# EAGLE board Yun_Shield.v2.3 (EAGLE 7.3.0)
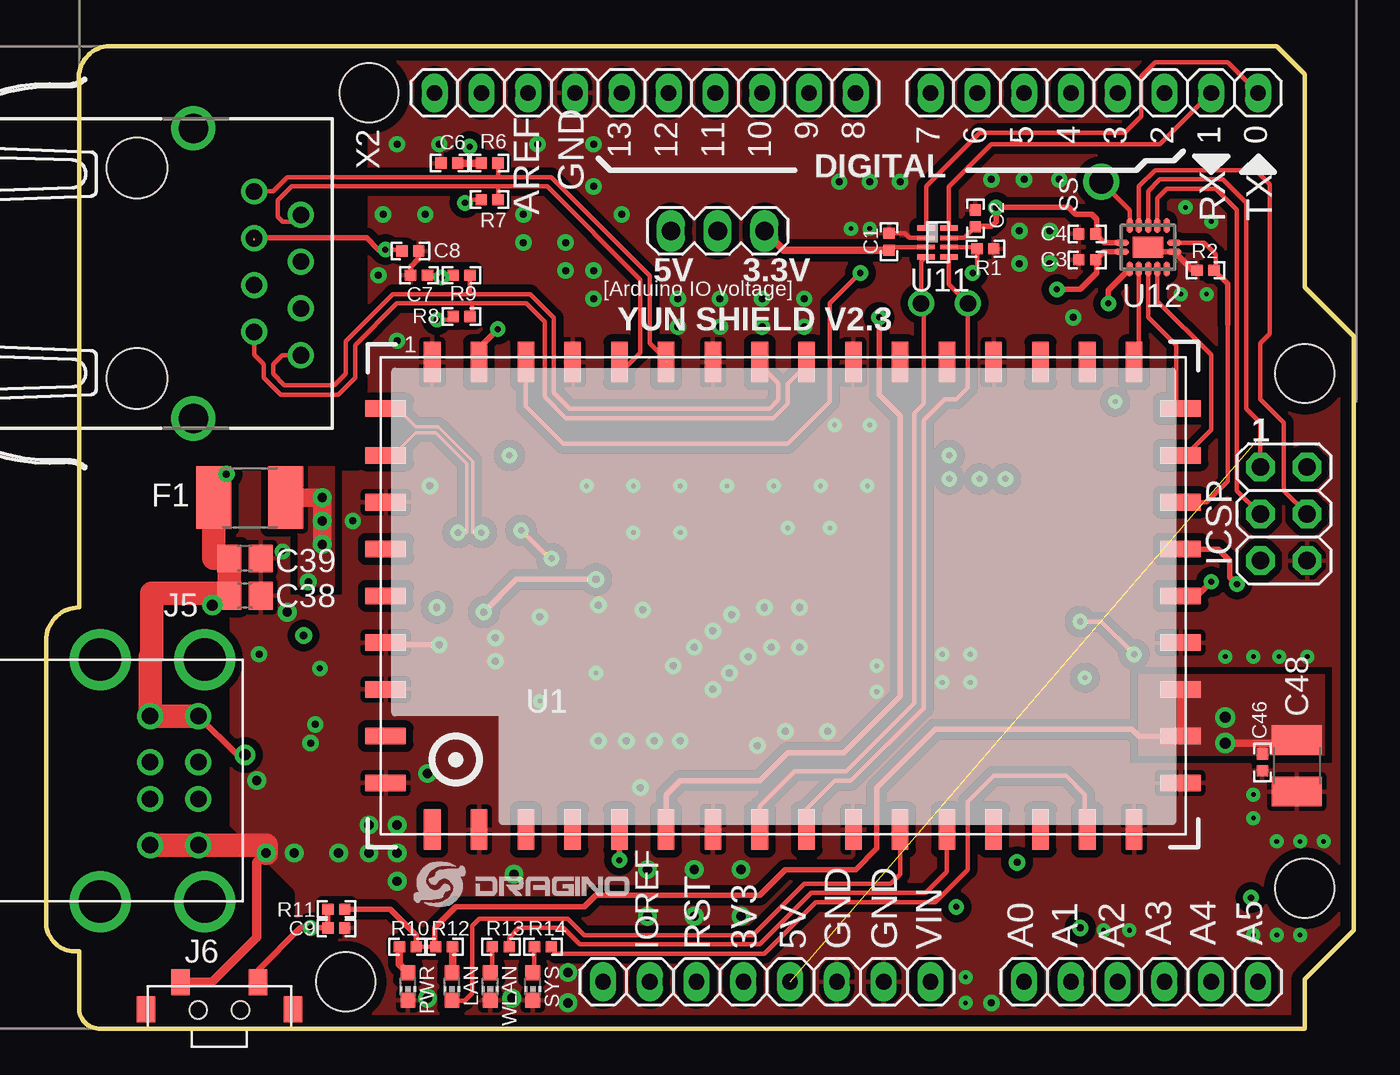
[diagram p0: board, top side]
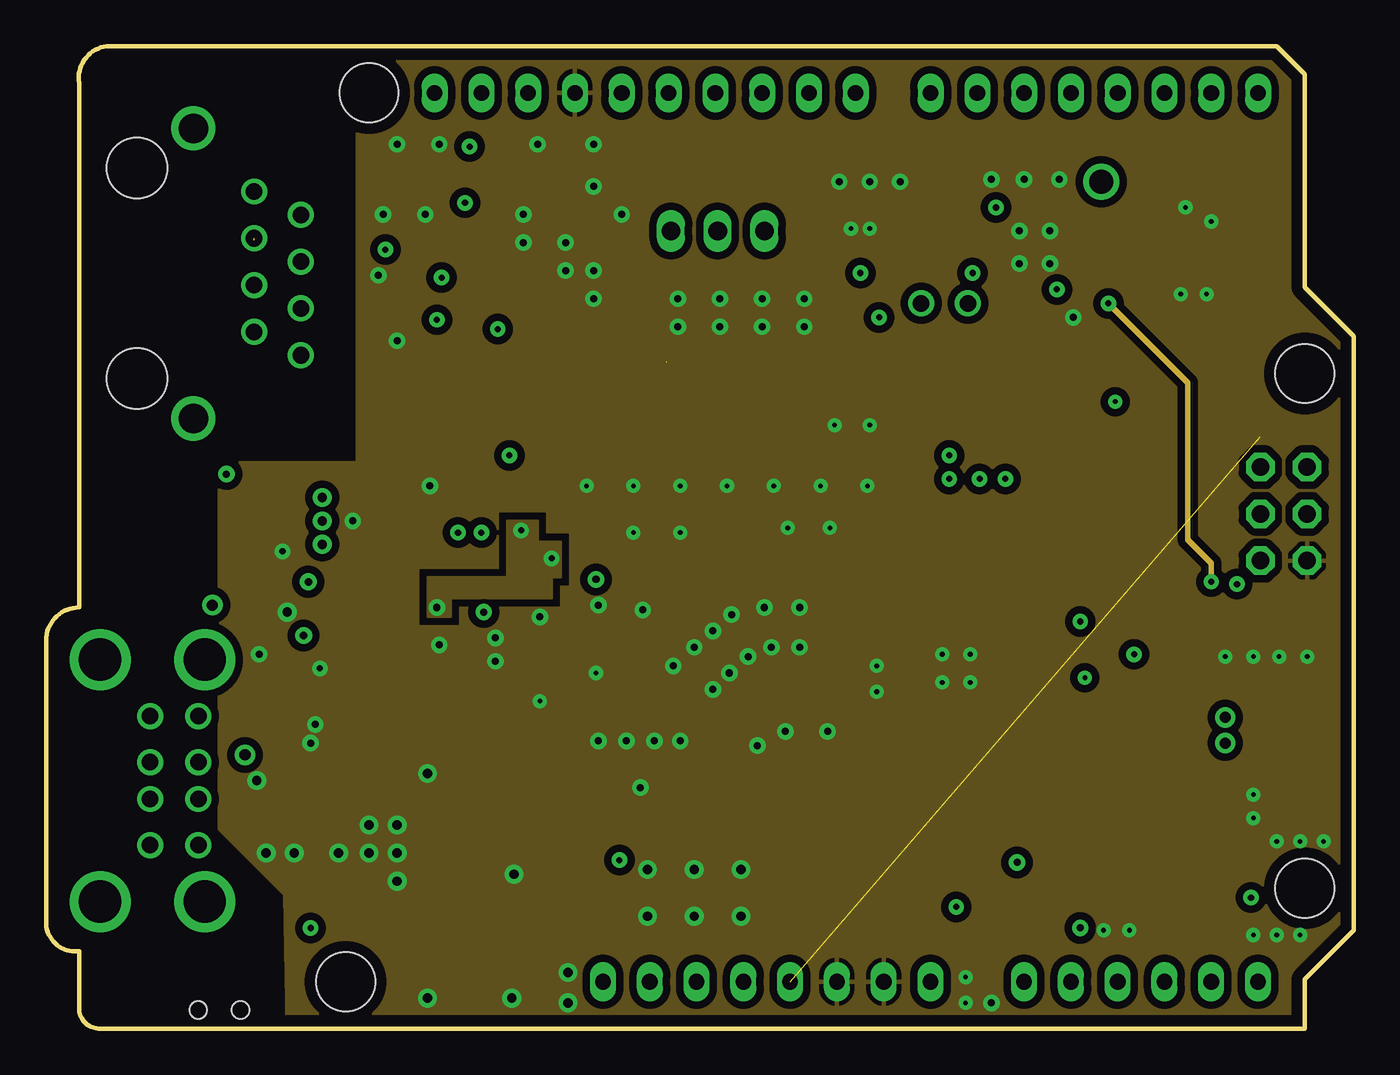
[diagram p1: board, inner layer GND]
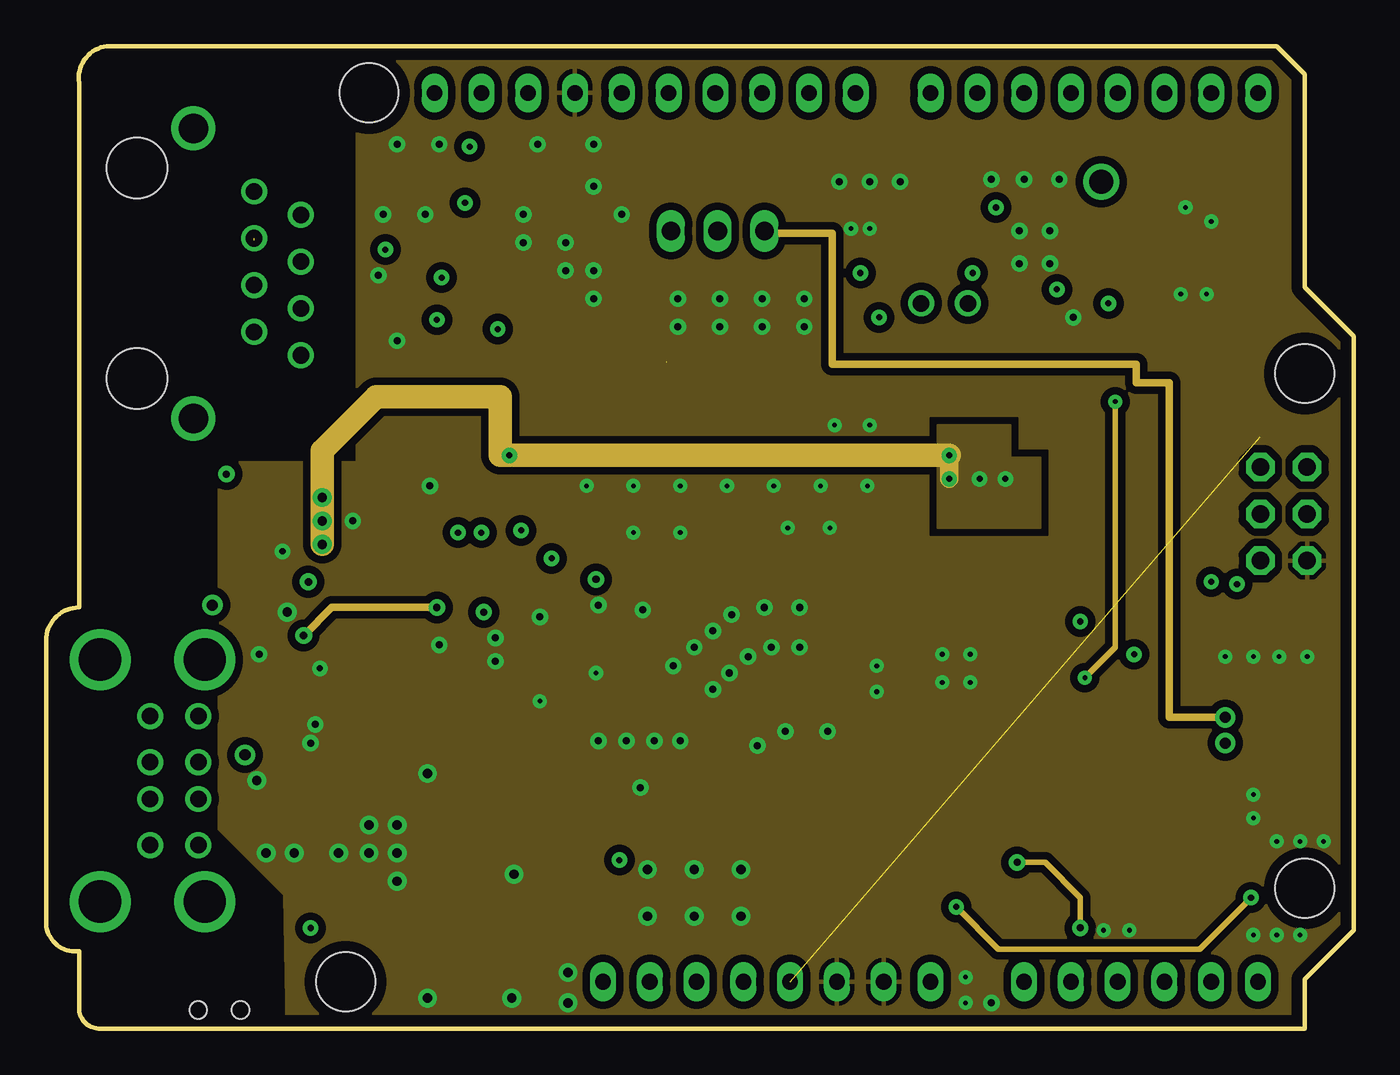
[diagram p2: board, inner layer VCC]
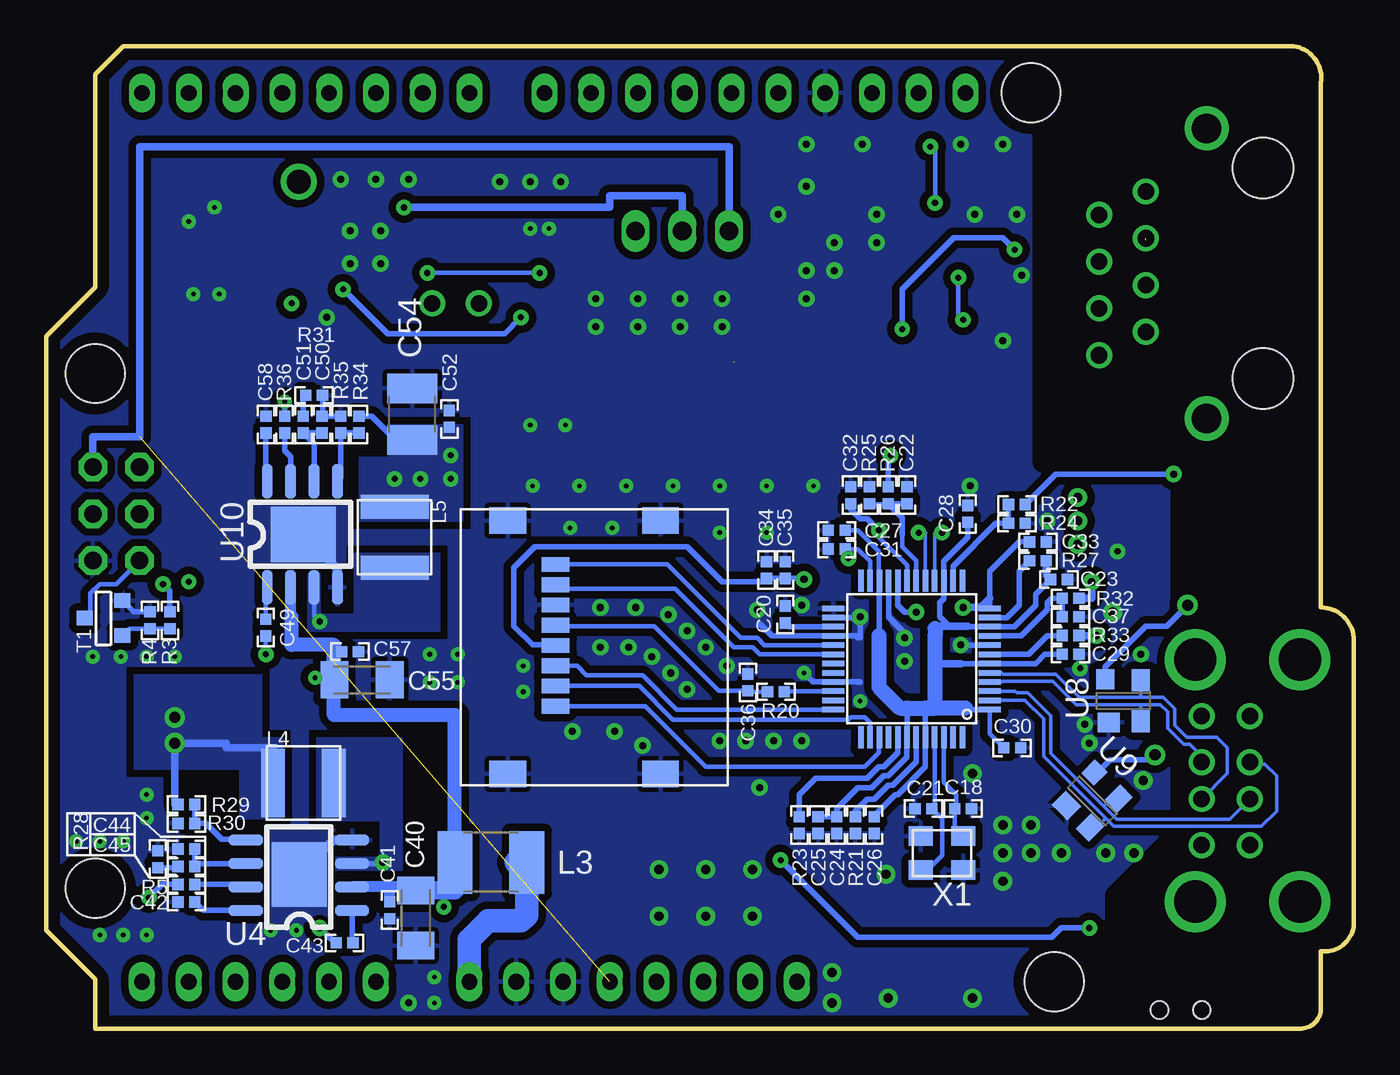
[diagram p3: board, bottom side, seen from below]

Size 71 x 53.35 mm. Coordinates in mm from the lower left corner, seen from the top.
Outline: 66.81,53.35 68.34,51.82 68.34,40.27 71,37.6 71,5.34 68.34,2.67 68.34,0.01 3.04,0.01 arc-90 1.79,1.02 1.79,4.2 1.41,4.2 arc-90 0.01,5.98 0.01,21.09 arc-90 1.79,22.87 1.79,51.35 arc-90 3.3,53.35 66.81,53.35
Copper layers (1*2+15*16): Top 0.035mm / dielectric 10mil / GND 0.017mm / dielectric 15mil / VCC 0.017mm / dielectric 10mil / Bottom 0.035mm
Design rules "default *": minimum track width 10mil, minimum drill 22mil, track to track 6mil, track to pad 8mil, pad to pad 8mil, via to via 12mil, smd to smd 8mil, copper to edge 24mil, drill to drill 12mil, minimum pad ring 10mil, minimum via ring 10mil, stop-mask expansion 2mil, vias tented up to drill 30mil, thermal gap 10mil
Net classes: 0 default: width 0.203 mm, clearance 0.254 mm; 1 power: width 0.254 mm, drill 0.61 mm, clearance 0.254 mm; 2 gnd: width 0.305 mm, drill 0.305 mm, clearance 0.254 mm; 3 usbvcc: width 0.254 mm, drill 0.61 mm, clearance 0.254 mm; 4 aref: width 0.254 mm, drill 0.61 mm, clearance 0.254 mm; 5 usbtrace: width 0.254 mm, clearance 0.152 mm; 6 usbtrace-4layer: width 0.191 mm, clearance 0.203 mm
Holes 3.2 mm at 68.34,35.57 68.34,7.63 17.54,50.81 16.27,2.55
tRestrict: area 3.1,0.9 to 16.9,52.6
bRestrict: area 3.1,0.9 to 16.9,52.5
vRestrict: area 43.6,35.2 to 44.1,35.7

## Footprints (pad centres in the part's own frame; a part is rotated, then mirrored left to right if it is on the bottom)
C0402 = smd 0.61 x 0.61: 1 -0.457,0; 2 0.457,0
C0805 = smd 1.3 x 1.5: 1 -0.85,0; 2 0.85,0
C1206K = smd 1.5 x 2: 1 -1.5,0; 2 1.5,0
C1210 = smd 1.6 x 2.7: 1 -1.4,0; 2 1.4,0
L1812 = smd 1.9 x 3.4: 1 -1.95,0; 2 1.95,0
2X03 = drill 0.95 pad 1.55 octagon: 1 -2.54,-1.27; 2 -2.54,1.27; 3 0,-1.27; 4 0,1.27; 5 2.54,-1.27; 6 2.54,1.27
1X08 = drill 0.85 pad 1.422 long: 1 -8.89,0; 2 -6.35,0; 3 -3.81,0; 4 -1.27,0; 5 1.27,0; 6 3.81,0; 7 6.35,0; 8 8.89,0
1X06 = drill 0.85 pad 1.422 long: 1 -6.35,0; 2 -3.81,0; 3 -1.27,0; 4 1.27,0; 5 3.81,0; 6 6.35,0
USB-DUAL-JS-AF10-002 = drill 0.9: 1 0,3.5; 2 0,1; 3 0,-1; 4 0,-3.5; 5 -2.62,3.5; 6 -2.62,1; 7 -2.62,-1; 8 -2.62,-3.5 | drill 2.3: 9 0.35,6.57; 10 0.35,-6.57; 11 -5.33,6.57; 12 -5.33,-6.57
TS-017 = smd 1 x 1.4: P$1 -2.1,-1.5; P$2 2.1,-1.5; P$3 -3.994,-0.034; P$4 3.994,-0.034 | hole 0.95: -1.15,0; 1.15,0
1X10 = drill 0.85 pad 1.422 long: 1 -11.43,0; 2 -8.89,0; 3 -6.35,0; 4 -3.81,0; 5 -1.27,0; 6 1.27,0; 7 3.81,0; 8 6.35,0; 9 8.89,0; 10 11.43,0
SWPA4020S = smd 3.7 x 1.3: P$1 0,1.65; P$2 0,-1.65
CHIP-LED0603 = smd 0.8 x 0.8: A 0,-0.75; C 0,0.75
R0402 = smd 0.61 x 0.61: 1 -0.457,0; 2 0.457,0
MA03-1 = drill 1.016 long: 1 -2.54,0; 2 0,0; 3 2.54,0
SOT-23 = smd 0.787 x 0.889: 1 0,-1.016; 2 -0.95,1.016; 3 0.95,1.016
TEST-POINT-TH = drill 1.3: P$1 0,0
HE50 = smd 0.9 x 2.198: 1 -19.05,12.69; 2 -16.51,12.69; 3 -13.97,12.69; 4 -11.43,12.69; 5 -8.89,12.69; 6 -6.35,12.69; 7 -3.81,12.69; 8 -1.27,12.69; 9 1.27,12.69; 10 3.81,12.69; 11 6.35,12.69; 12 8.89,12.69; 13 11.43,12.69; 14 13.97,12.69; 15 16.51,12.69; 16 19.05,12.69; 26 19.05,-12.69; 27 16.51,-12.69; 28 13.97,-12.69; 29 11.43,-12.69; 30 8.89,-12.69; 31 6.35,-12.69; 32 3.81,-12.69; 33 1.27,-12.69; 34 -1.27,-12.69; 35 -3.81,-12.69; 36 -6.35,-12.69; 37 -8.89,-12.69; 38 -11.43,-12.69; 39 -13.97,-12.69; 40 -16.51,-12.69; 41 -19.05,-12.69 | smd 2.198 x 0.9: 17 21.579,10.16; 18 21.579,7.62; 19 21.579,5.08; 20 21.579,2.54; 21 21.579,0; 22 21.579,-2.54; 23 21.579,-5.08; 24 21.579,-7.62; 25 21.579,-10.16; 42 -21.579,-10.16; 43 -21.579,-7.62; 44 -21.579,-5.08; 45 -21.579,-2.54; 46 -21.579,0; 47 -21.579,2.54; 48 -21.579,5.08; 49 -21.579,7.62; 50 -21.579,10.16
AU6350_LQFP-48 = smd 1.2 x 0.3: 1 -4.25,2.75; 2 -4.25,2.25; 3 -4.25,1.75; 4 -4.25,1.25; 5 -4.25,0.75; 6 -4.25,0.25; 7 -4.25,-0.25; 8 -4.25,-0.75; 9 -4.25,-1.25; 10 -4.25,-1.75; 11 -4.25,-2.25; 12 -4.25,-2.75; 25 4.25,-2.75; 26 4.25,-2.25; 27 4.25,-1.75; 28 4.25,-1.25; 29 4.25,-0.75; 30 4.25,-0.25; 31 4.25,0.25; 32 4.25,0.75; 33 4.25,1.25; 34 4.25,1.75; 35 4.25,2.25; 36 4.25,2.75 | smd 0.3 x 1.2: 13 -2.75,-4.25; 14 -2.25,-4.25; 15 -1.75,-4.25; 16 -1.25,-4.25; 17 -0.75,-4.25; 18 -0.25,-4.25; 19 0.25,-4.25; 20 0.75,-4.25; 21 1.25,-4.25; 22 1.75,-4.25; 23 2.25,-4.25; 24 2.75,-4.25; 37 2.75,4.25; 38 2.25,4.25; 39 1.75,4.25; 40 1.25,4.25; 41 0.75,4.25; 42 0.25,4.25; 43 -0.25,4.25; 44 -0.75,4.25; 45 -1.25,4.25; 46 -1.75,4.25; 47 -2.25,4.25; 48 -2.75,4.25
RT8250-SOP8 = smd 1.88 x 0.61: 1 -1.219,0; 2 -1.219,-1.27; 3 -1.219,-2.54; 4 -1.219,-3.81; 5 4.547,-3.81; 6 4.547,-2.54; 7 4.547,-1.27; 8 4.547,0 | smd 2.997 x 3.505: 9 1.651,-1.956
SOT143 = smd 1.194 x 1.067: 1 -0.72,-1.207 | smd 0.991 x 1.194: 2 1.007,-1.143; 3 1.007,1.067 | smd 0.991 x 1.067: 4 -0.923,1.13
NXP-SOT833-1 = smd 1 x 0.3: 1 -0.614,0.778 | smd 0.95 x 0.25: 2 -0.639,0.253; 3 -0.639,-0.247; 6 0.611,-0.247; 7 0.611,0.253 | smd 0.95 x 0.3: 4 -0.639,-0.772; 5 0.611,-0.772; 8 0.611,0.778
DHVQFN14 = smd 0.8 x 0.35: 1 -1.425,-0.25; 7 1.425,-0.25; 8 1.425,0.25; 14 -1.425,0.25 | smd 0.35 x 0.8: 2 -1,-1.175; 3 -0.5,-1.175; 4 0,-1.175; 5 0.5,-1.175; 6 1,-1.175; 9 1,1.175; 10 0.5,1.175; 11 0,1.175; 12 -0.5,1.175; 13 -1,1.175 | smd 1.65 x 1.15: EXP 0,0
RIONET_472192001_SD = smd 0.8 x 1.5: 1 3.2,-1.55; 2 2.1,-1.55; 3 1,-1.55; 4 -0.1,-1.55; 5 -1.2,-1.55; 6 -2.3,-1.55; 7 -3.4,-1.55; 8 -4.5,-1.55 | smd 1.45 x 2: G1 6.875,-4.15; G2 6.875,4.15; G3 -6.875,4.15; G4 -6.875,-4.15
SMARTPRJ_CRYSTAL-3.2-2.5 = smd 1.3 x 1.05: 1 -1.15,-0.925; 2 1.15,-0.925; 3 1.15,0.925; 4 -1.15,0.925
RJ111BE = drill 0.9 pad 1.3: 1 -4.445,0; 2 -3.175,2.54; 3 -1.905,0; 4 -0.635,2.54; 5 0.635,0; 6 1.905,2.54; 7 3.175,0; 8 4.445,2.54 | drill 1.6 pad 2.184: M1 -7.875,-3.3; M2 7.875,-3.3 | hole 3.3: 5.715,-6.35; -5.715,-6.35

## Placement (x,y rotation side)
C1  0.1uF  [C0402]  45.77,42.72 270 top
C2  0.1uF  [C0402]  50.45,43.99 270 top
C3  0.1uF  [C0402]  56.53,41.74 0 top
C4  0.1uF  [C0402]  56.53,43.15 0 top
C6  0.1u 10v  [C0402]  21.9,47 180 top
C7  0.1u 10v  [C0402]  20.25,40.9 180 top
C8  0.1u 10v  [C0402]  19.78,42.22 0 top
C9  0.1u NL  [C0402]  15.76,5.47 0 top
C18  18pF  [C0402]  21.22,11.94 0 bottom
C20  1uF  [C0402]  30.87,22.49 90 bottom
C21  18pF  [C0402]  23.38,11.94 180 bottom
C22  1uF  [C0402]  24.27,28.96 90 bottom
C23  4.7uF  [C0402]  16.01,24.39 0 bottom
C24  4.7uF  [C0402]  28.08,11.06 270 bottom
C25  1uF  [C0402]  29.09,11.06 270 bottom
C26  4.7uF  [C0402]  26.05,11.06 270 bottom
C27  0.1uF  [C0402]  28.08,27.06 180 bottom
C28  0.1uF  [C0402]  20.97,27.95 90 bottom
C29  0.1uF  [C0402]  15.38,20.33 0 bottom
C30  0.1uF  [C0402]  18.55,15.25 0 bottom
C31  4.7uF  [C0402]  28.08,26.04 180 bottom
C32  4.7uF  [C0402]  27.32,28.96 90 bottom
C33  0.1uF  [C0402]  17.16,26.42 0 bottom
C34  0.1uF  [C0402]  31.89,24.9 90 bottom
C35  1uF  [C0402]  30.87,24.9 90 bottom
C36  10pf,NL  [C0402]  32.9,18.8 90 bottom
C37  2.2uF  [C0402]  15.38,22.36 0 bottom
C38  10uF  [C0805]  10.81,23.5 180 top
C39  10uF  [C0805]  10.81,25.53 180 top
C40  10u,25v  [C1206K]  50.94,6.01 270 bottom
C41  NL  [C0402]  52.34,6.43 270 bottom
C42  0.1u,10v  [C0402]  63.38,6.88 180 bottom
C43  0.01u,16v  [C0402]  54.8,4.66 180 bottom
C44  NL  [C0402]  63.38,9.76 0 bottom
C45  3900pf,25v  [C0402]  63.38,8.8 0 bottom
C46  NL  [C0402]  66.03,14.46 90 top
C48  22u,10v  [C1210]  67.9,14.27 270 top
C49  0.01u,16v  [C0402]  59.07,21.77 270 bottom
C50  NL  [C0402]  56.02,32.8 270 bottom
C51  3900pf,25v  [C0402]  57.03,32.8 270 bottom
C52  NL  [C0402]  49.11,33.1 270 bottom
C54  22u,10v  [C1210]  51.12,33.37 90 bottom
C55  10uf,25v  [C1206K]  53.84,18.94 0 bottom
C57  NL  [C0402]  54.5,20.47 0 bottom
C58  0.1u,10v  [C0402]  59.07,32.8 90 bottom
F1  Fuse , 1A  [L1812]  11.06,28.84 0 top
ICSP  ICSP  [2X03]  67.19,27.95 270 top
J2  8x1F-H8.5  [1X08]  56.91,50.81 180 top
J3  8x1F-H8.5  [1X08]  39.13,2.55 0 top
J4  6x1F-H8.5  [1X06]  59.45,2.55 0 top
J5  USB-CON-A-DUAL  [USB-DUAL-JS-AF10-002]  8.27,13.47 0 top
J6  SWITCHTS-017  [TS-017]  9.41,1.02 180 top
JP1  10x1F-H8.5  [1X10]  32.52,50.81 180 top
L3  1A  [L1812]  46.85,9.03 180 bottom
L4  10uH /SWPA4020S100MT  [SWPA4020S]  57.03,13.34 270 bottom
L5  15uH / SWPA4030S150MT  [SWPA4020S]  52.08,26.68 180 bottom
LAN  Yellow  [CHIP-LED0603]  22.03,2.29 180 top
PWR  Yellow-Green  [CHIP-LED0603]  19.65,2.29 180 top
R1  10k  [R0402]  51,42.34 180 top
R2  10k  [R0402]  62.94,41.18 0 top
R3  10k  [R0402]  64.28,22.17 90 bottom
R4  10k  [R0402]  65.36,22.17 90 bottom
R5  100K  [R0402]  63.38,7.83 180 bottom
R6  49.9R  [R0402]  24.08,47 0 top
R7  49.9R  [R0402]  24.08,45.01 0 top
R8  49.9R  [R0402]  22.56,38.66 0 top
R9  49.9R  [R0402]  22.56,40.9 0 top
R10  330R  [R0402]  19.64,4.45 180 top
R11  10K  [R0402]  15.76,6.48 0 top
R12  330R  [R0402]  21.61,4.45 0 top
R13  270R  [R0402]  24.69,4.45 180 top
R14  270R  [R0402]  26.97,4.45 180 top
R20  0R  [R0402]  31.38,18.29 180 bottom
R21  680  [R0402]  27.06,11.06 90 bottom
R22  5.1K  [R0402]  18.3,28.45 0 bottom
R23  330  [R0402]  30.11,11.06 270 bottom
R24  10K  [R0402]  18.3,27.44 180 bottom
R25  470K  [R0402]  26.3,28.96 90 bottom
R26  47K  [R0402]  25.28,28.96 90 bottom
R27  0R  [R0402]  17.16,25.41 180 bottom
R28  6.81K  [R0402]  64.94,9.2 270 bottom
R29  26.1K  [R0402]  63.38,12.17 180 bottom
R30  10K  [R0402]  63.38,11.14 0 bottom
R31  6.81K  [R0402]  56.45,34.39 180 bottom
R32  0R  [R0402]  15.38,23.37 180 bottom
R33  0R  [R0402]  15.38,21.34 180 bottom
R34  45.3K  [R0402]  54.02,32.8 90 bottom
R35  10K  [R0402]  55.01,32.8 270 bottom
R36  100K  [R0402]  58.05,32.8 90 bottom
SV1  [MA03-1]  36.46,43.31 0 top
SYS  WHITE  [CHIP-LED0603]  26.43,2.29 180 top
T1  BSS138/SOT23  [SOT-23]  67.88,22.29 270 bottom
TP1  TEST-POINTTH  [TEST-POINT-TH]  57.29,45.98 0 top
U1  HE  [HE50]  40.02,23.5 0 top
U3  AU6353  [AU6350_LQFP-48]  24.01,20.07 180 bottom
U4  RT8250  [RT8250-SOP8]  55.61,6.43 180 bottom
U8  YSSR05  [SOT143]  12.58,17.84 0 bottom
U9  YSSR05  [SOT143]  14.23,12.45 315 bottom
U10  RT8250  [RT8250-SOP8]  59,25.18 90 bottom
U11  NTB0102GT  [NXP-SOT833-1]  48.4,42.68 0 top
U12  NTB0104  [DHVQFN14]  59.83,42.42 0 top
U$1  LOGO-NEW  [LOGO-SILK-NEW]  19.95,6.61 0 top
U$14  [RIONET_472192001_SD]  41.79,20.71 270 bottom
WLAN  BLUE  [CHIP-LED0603]  24.12,2.29 180 top
X1  12Mhz  [SMARTPRJ_CRYSTAL-3.2-2.5]  22.36,9.53 180 bottom
X2  RJ111BE  [RJ111BE]  11.3,41.01 270 top

## Library data of the parts
C1-C4 C6-C9 C18 C20-C46 C48-C52 C54 C55 C57 C58 F1 J5 J6 L3-L5 LAN PWR R1-R14 R20-R36 SYS U1 U3 U4 U8-U12 U$1 U$14 WLAN = dragino
ICSP J2-J4 JP1 = SmartPrj
SV1 = con-lstb; OC_FARNELL: unknown; OC_NEWARK: unknown
T1 X2 = dragino; OC_FARNELL: unknown; OC_NEWARK: unknown
TP1 = dragino-passive
X1 = rionita7

## Nets
2.5V: C3.2 U1.36 U12.1
+3V3: C1.2 C46.2 C48.1 L4.P$2 R10.1 R11.2 R12.1 R29.2 SV1.3 U1.23 U1.24 U11.3
+5V [usbvcc]: ICSP.2 J3.5 SV1.1
+5V_USB [usbvcc]: C52.2 C54.1 F1.2 L5.P$2 R26.2 R32.1 R34.2
/RESET: ICSP.5 T1.1
CHIP_RESETN: C22.1 R25.1 R26.1 U3.18
CPWR_V33: C34.1 C35.1 U3.20 U$14.4
CTRL_2.0V: C8.1 U1.2 X2.3
DP1_OVRCUR: R22.1 R24.2 U3.14
DP1_PWRUP: U3.13
GND [gnd]: C1.1 C2.1 C3.1 C4.1 C6.2 C7.2 C8.2 C9.2 C18.2 C20.2 C21.2 C22.2 C23.2 C24.2 C25.2 C26.2 C27.2 C28.2 C29.2 C30.2 C31.2 C32.2 C33.2 C34.2 C35.2 C36.2 C37.2 C38.1 C39.1 C40.2 C41.2 C42.2 C44.1 C46.1 C48.2 C50.1 C52.1 C54.2 C55.2 C57.2 C58.2 ICSP.6 J3.6 J3.7 J5.4 J5.8 J6.P$2 JP1.7 PWR.C R1.1 R2.1 R4.2 R21.1 R23.2 R24.1 R25.2 R28.1 R30.1 R31.1 R35.1 SYS.C T1.2 U1.1 U1.4 U1.7 U1.10 U1.13 U1.22 U1.25 U1.26 U1.32 U1.35 U1.40 U1.42 U1.44 U1.45 U1.48 U3.8 U3.21 U3.25 U3.26 U3.28 U3.33 U4.4 U4.9 U8.1 U9.1 U10.4 U10.9 U11.2 U12.7 U12.EXP U$14.6 U$14.G1 U$14.G2 U$14.G3 U$14.G4 WLAN.C X1.2 X1.4
GPIO18: U1.18 U12.5
GPIO19: R2.2 U1.19 U12.8
GPIO20: R3.2 U1.20
GPIO21: U1.16 U12.3
GPIO22: U1.17 U12.4
GPIO23: U1.21 U12.2
GPIO24: R1.2 U1.3 U11.6
GPIO28: R14.1 U1.27
JUMPSTART: C9.1 J6.P$1 R11.1 U1.37
LED_P0: LAN.C U1.31
LED_WLAN: R13.1 U1.30
MISO: ICSP.1 U12.11
MOSI: ICSP.4 U12.12
N$1: R3.1 R4.1 T1.3
N$3: C6.1 R6.1 R7.1
N$4: PWR.A R10.2
N$5: C7.1 R8.1 R9.1
N$6: LAN.A R12.2
N$8: R13.2 WLAN.A
N$9: R14.2 SYS.A
N$11: R5.1 U4.7
N$12: R23.1 U3.41
N$16: R21.2 U3.43
N$19: C42.1 U4.8
N$22: C36.1 R20.2 U$14.5
N$23: C20.1 U3.27
N$24: R27.2 U3.11
N$25: C43.1 U4.1
N$26: C43.2 L4.P$1 U4.3
N$27: C44.2 C45.2 U4.6
N$28: C45.1 R28.2
N$29: C37.1 R32.2 U3.9
N$30: R33.2 U3.7
N$31: R29.1 R30.2 U4.5
N$32: C49.1 U10.1
N$33: C49.2 L5.P$1 U10.3
N$34: C50.2 C51.2 U10.6
N$35: C51.1 R31.2
N$36: R34.1 R35.2 U10.5
N$37: R36.1 U10.7
N$38: C58.1 U10.8
N$101: C40.1 C41.1 C55.1 C57.1 L3.2 R5.2 R36.2 U4.2 U10.2
OPTIONAL_ANT: U1.41
P0_RX_N: R9.2 U1.8 X2.8
P0_RX_P: R8.2 U1.9 X2.7
P0_TX_N: R7.2 U1.5 X2.2
P0_TX_P: R6.2 U1.6 X2.1
P1_P2_PWR: C38.2 C39.2 F1.1 J5.1 J5.5 R22.2 U8.4 U9.4
RX: J2.1 U11.1
SCK: ICSP.3 U12.10
SD_CLK: R20.1 U3.34
SD_CMD: U3.36 U$14.3
SD_DAT0: U3.30 U$14.7
SD_DAT1: U3.29 U$14.8
SD_DAT2: U3.39 U$14.1
SD_DAT3: U3.38 U$14.2
SS: TP1.P$1 U12.13
TX: J2.2 U11.8
UART_RX: U1.33 U11.5
UART_TX: U1.34 U11.4
USB3_D_N [usbtrace-4layer]: J5.6 U3.2 U9.2
USB3_D_P [usbtrace-4layer]: J5.7 U3.3 U9.3
USB4_D_N [usbtrace-4layer]: J5.2 U3.4 U8.2
USB4_D_P [usbtrace-4layer]: J5.3 U3.5 U8.3
USB_N [usbtrace]: U1.50 U3.17
USB_P [usbtrace]: U1.49 U3.16
VCC1.8: C31.1 C32.1 C33.1 R33.1 U3.12 U3.19 U3.23
VCC3.3: C23.1 C24.1 C25.1 C26.1 C27.1 C28.1 C29.1 C30.1 R27.1 U3.1 U3.6 U3.10 U3.15 U3.22 U3.42 U3.44
VDC [usbvcc]: C2.2 C4.2 SV1.2 U11.7 U12.14
VIN: J3.8 L3.1
XSCI: C18.1 U3.46 X1.1
XSCO: C21.1 U3.45 X1.3

## Tracks (layer width: path | path; a pad name or v marks a point on that pad's centre or on a via)
2.5V  (via drill 0.33)
  Top 0.305: U12.1 57.42,42.17 C3.2 57.03,41.69 57.03,41.03 56.14,40.14 v54.87,40.14 | U1.36 33.67,12.71 34.43,13.47 38.75,13.47 40.27,14.99 43.32,14.99 46.37,18.04 46.37,33.28 45.22,34.42 v45.22,38.61
  Bottom 0.305: v45.22,38.61 46.11,37.73 52.46,37.73 v54.87,40.14
+3V3  (via drill 0.6)
  Top 0.254: R12.1 R10.1 | U11.3 45.93,42.43 C1.2
  Top 0.305: U1.24 59.32,15.88 58.94,16.26 48.27,16.26 45.1,13.09 45.1,9.79 43.95,8.64 40.14,8.64 38.75,7.25 29.86,7.25 29.22,6.61 22.24,6.61 21.09,5.47 21.09,4.51 R12.1 | R10.1 20.1,5.06 18.68,6.48 R11.2
  Top 0.406: C46.2 66.03,15.5 | 66.03,15.5 v64.02,15.5 | C48.1 67.9,15.5 66.03,15.5 | U1.23 U1.24 | C1.2 40.05,42.27 SV1.3
  VCC 0.406: v64.02,16.9 60.97,16.9 60.97,35.06 59.19,35.06 59.19,36.07 42.68,36.07 42.68,43.19 39,43.19 SV1.3
  Bottom 0.406: R29.2 64.02,12.17 v64.02,15.5 61.22,15.5 61.22,15.25 58.68,15.25 L4.P$2
  pour Bottom (no thermals): 58.18,15.75 58.18,11.44 60.46,11.44 60.46,14.1 66.18,14.1 66.18,19.18 59.32,19.18 59.32,15.75
  pour Top (no thermals): 59.32,19.18 69.35,19.18 69.35,14.87 59.32,14.87
+5V  (1 unrouted)
  Bottom 0.406: ICSP.2 68.46,32.14 65.92,32.14 65.92,47.89 33.92,47.89 SV1.1
+5V_USB  (via drill 0.33, 0.41, 0.51)
  Top 1.016: v15,26.3 v15,28.84 F1.2
  VCC 1.016: v49.03,29.85 v49.03,31.12 | 25.41,31.12 v25.16,31.12
  VCC 1.27: v49.03,31.12 25.41,31.12 | v25.16,31.12 24.65,31.12 24.65,34.3 17.92,34.3 15,31.38 v15,26.3
  Bottom 0.305: R34.2 53.33,33.26 52.08,32.01 51.17,32.01 C54.1 | R26.2 25.28,31.12 v25.16,31.12
  Bottom 0.406: R32.1 14.23,23.37 v14.23,24.26
  other vias: 50.68,29.85 52.08,29.85 15,27.57
  pour Bottom (no thermals): 48.4,32.77 48.4,27.57 53.99,27.57 53.99,30.99 52.33,30.99 52.33,32.77
  pour VCC (no thermals): 48.4,31.76 48.4,27.18 53.99,27.18 53.99,30.99 52.33,30.99 52.33,32.77 48.4,32.77
  pour Top: 13.85,30.49 15.63,30.49 15.63,24.01 13.73,24.01 13.73,30.49
/RESET
  Bottom 0.254: T1.1 68.59,22.6 68.59,23.63 68.08,24.14 67.19,24.14 ICSP.5
CHIP_RESETN
  Bottom 0.254: 24.52,26.8 24.52,26.17 23.76,25.41 U3.18
  Bottom 0.305: 24.52,26.8 24.52,27.74 R26.1 | R26.1 25.28,28.45 26.25,28.45 R25.1 | R26.1 C22.1
CPWR_V33  (via drill 0.38)
  Top 0.305: v23.76,22.61 25.54,24.39 v29.86,24.39
  Bottom 0.305: U3.20 24.78,24.31 24.78,22.99 24.39,22.61 v23.76,22.61 | U$14.4 43.37,20.83 44.59,20.83 45.6,21.85 45.6,25.03 44.46,26.17 36.21,26.17 34.3,24.26 32.07,24.26 C34.1 C35.1 29.91,24.44 v29.86,24.39
CTRL_2.0V  (via drill 0.33)  (1 unrouted)
  Top 0.254: v18.43,42.3 19.31,42.3 C8.1 | C8.1 | C8.1 19.31,42.17
  Top 0.305: v18.43,42.3 18.04,42.3 17.41,42.93 11.44,42.93 11.31,42.81 | 23.51,36.05 U1.2 23.51,36.96 v24.52,37.98
  Bottom 0.305: v24.52,37.98 24.52,40.14 21.73,42.93 19.06,42.93 v18.43,42.3
DP1_OVRCUR
  Bottom 0.305: U3.14 21.76,25.12 19.44,27.44 R24.2 R22.1
GND  (via drill 0.25, 0.33, 0.38, 0.51)
  Top 0.254: C1.1 46.63,43.18 46.87,42.93 U11.2
  Top 0.305: v21.35,20.83 18.58,20.83 18.57,20.85 | C7.2 19.79,41.38 20.2,41.79 20.2,42.3 | R2.1 62.25,41.18 U12.7 60.08,42.17 U12.EXP
  Top 0.508: v11.95,9.53 11.44,9.02 11.44,4.96 9,2.52 J6.P$2
  Top 1.27: J5.8 J5.4 11.95,9.97 v11.95,9.53
  Bottom 0.305: U3.21 25.26,22.34 24.39,21.47 | U3.26 26.9,22.32 26.81,22.23 | 26.95,18.82 26.93,18.8 | U3.8 20.95,20.82 20.97,20.83 v21.35,20.83 | R4.2 66.26,22.63 T1.2 | R31.1 55.99,33.28 C50.1 R35.1 | v26.81,22.36 26.81,21.22 26.93,21.22 26.93,21.32 U3.28 31.61,21.32 32.27,21.98 | v29.86,19.31 29.37,18.82 28.33,18.82 U3.33 26.83,18.82 26.81,18.8
  Bottom 0.508: U10.4 55.19,24.97 U10.9 | U4.4 55.41,10.24 U4.9
  other vias: 25.28,1.66 20.71,1.66 19.06,8.01 13.47,9.53 17.54,9.53 13.09,22.61 12.84,25.91 28.33,3.05 15.89,9.53 17.54,11.06 19.06,11.06 19.06,9.53 25.41,8.39 31.51,15.63 24.39,21.22 24.39,19.95 34.05,19.69 33.03,15.63 34.43,15.63 29.98,15.63 39.38,20.71 40.9,20.71 35.19,20.71 36.21,21.6 37.22,22.49 39,22.87 40.9,22.87 38.11,20.2 37.09,19.31 36.21,18.42 14.62,16.52 14.36,15.5 14.87,19.56 20.84,29.47 16.65,27.57 32.4,22.74 29.98,22.99 29.35,29.47 38.62,15.37 40.14,16.14 42.43,16.14 20.71,13.85 11.44,13.47 11.57,20.33 32.27,13.09 51.32,1.4 51.32,46.11 53.1,46.11 55,46.11 46.37,45.98 44.71,45.98 43.06,45.98 34.3,39.63 36.59,39.63 38.87,39.63 41.16,39.63 41.16,38.11 38.87,38.11 36.59,38.11 34.3,38.11 25.92,44.2 25.92,42.68 28.2,42.68 28.2,41.15 29.73,39.63 29.73,41.15 19.06,37.34 18.3,44.2 20.58,44.2 19.06,48.01 21.35,48.01 26.68,48.01 29.73,48.01 29.73,45.73 31.25,44.2 18.04,40.9 37.73,6.1 35.19,6.1 32.65,6.1 37.73,8.64 35.19,8.64 32.65,8.64 28.33,1.4 31.89,29.47 34.43,29.47 36.97,29.47 39.51,29.47 42.05,29.47 44.59,29.47 31.89,26.93 34.43,26.93 40.27,27.18 42.56,27.18 45.1,19.69 45.1,18.29 48.65,20.33 50.18,20.33 50.18,18.8 48.65,18.8 65.54,12.71 65.54,11.44 66.81,10.17 68.08,10.17 69.35,10.17 65.54,5.09 66.81,5.09 68.08,5.09 57.41,5.34 58.81,5.34 49.92,2.8 49.92,1.4 64.02,20.2 65.54,20.2 66.94,20.2 68.46,20.2 52.84,43.31 54.49,43.31 54.49,41.54 52.84,41.54 42.81,32.77 44.71,32.77 43.7,43.44 44.71,43.44 61.61,39.88 63,39.88 61.86,44.58 63.26,43.82 55.76,38.61 26.81,17.79
  pour Bottom (isolate 0.406, rank 2): 88.66,52.71 88.66,0.64 3.93,0.64 arc-90 2.93,1.64 2.93,52.58 40.02,52.58
  pour Top (isolate 0.406, rank 2): 88.66,52.58 88.66,0.88 arc-90 72.54,0.39 4.06,0.39 arc-90 2.93,1.64 2.93,52.58
  pour VCC (isolate 0.406, rank 2): 71,53.35 71,0.01 13.09,0.01 12.96,7.25 9.41,10.8 9.41,30.74 16.9,30.74 16.9,53.35
  pour GND (isolate 0.406, rank 2): 71,53.35 71,0.01 13.09,0.01 12.96,7.25 9.41,10.8 9.41,30.74 16.9,30.74 16.9,53.35
  pour Bottom (no thermals): 58.94,10.55 58.94,5.85 55.64,5.85 55.64,10.55
  pour Bottom (no thermals): 60.46,28.33 60.46,25.15 54.75,25.15 54.75,28.33
GPIO18
  Top 0.254: U1.18 61.86,31.12 63.26,32.52 63.26,36.58 60.34,39.5 U12.5
GPIO19
  Top 0.254: U1.19 63,28.58 64.15,29.72 64.15,38.23 | U12.8 62.88,42.67 63.51,42.04 63.51,41.29 R2.2
  Top 0.305: 64.15,38.23 64.15,40.43 R2.2
GPIO20  (via drill 0.33)
  Top 0.305: U1.20 63.64,26.04 64.27,25.41 64.27,24.52 v64.65,24.14
  Bottom 0.305: v64.65,24.14 64.28,23.76 R3.2
GPIO21
  Top 0.254: U12.3 59.33,36.45 U1.16
GPIO22
  Top 0.254: U12.4 59.83,38.61 61.35,37.09 61.35,33.9 U1.17
GPIO23  (via drill 0.33)
  Top 0.305: U1.21 62.49,23.5 v63.26,24.26 | v57.67,39.38 57.67,40.09 U12.2
  GND 0.305: v63.26,24.26 63.26,25.28 61.99,26.55 61.99,35.06 v57.67,39.38
GPIO24  (via drill 0.33)
  Top 0.254: U1.3 26.05,33.79 28.08,31.76 40.27,31.76 42.56,34.04 42.56,39.38 v44.21,41.03 | U11.6 50.45,42.43 R1.2 50.54,41.27 v50.3,41.03
  Bottom 0.254: v44.21,41.03 v50.3,41.03
GPIO28
  Top 0.254: 27.44,4.44 R14.1 27.43,4.34 27.7,4.07 39,4.07 41.79,6.86 48.27,6.86 50.05,8.64 50.05,12.33 51.45,13.72 55.38,13.72 56.4,12.71 56.4,10.95 56.53,10.95 U1.27
JUMPSTART  (via drill 0.33)
  Top 0.305: 31.13,10.95 U1.37 v31.13,9.15 | v14.36,5.47 C9.1 | C9.1 13.79,5.47 11.51,3.18 J6.P$1 | R11.1 C9.1
  Bottom 0.305: v31.13,9.15 26.93,4.96 16.39,4.96 15.89,5.47 v14.36,5.47
LED_P0
  Top 0.254: U1.31 46.37,8.39 45.86,7.88 41.16,7.88 38.36,5.09 29.22,5.09 28.33,5.98 23.51,5.98 23.12,5.59 23.12,1.91 22.74,1.53 22.04,1.53 LAN.C
LED_WLAN
  Top 0.254: 25.16,4.44 R13.1 25.14,4.95 25.66,5.47 28.08,5.47 28.97,4.58 38.75,4.58 41.54,7.37 47.76,7.37 48.91,8.52 U1.30
MISO
  Top 0.254: ICSP.1 65.92,32.9 65.16,33.66 65.16,44.84 63.89,46.11 60.46,46.11 59.83,45.47 U12.11
MOSI
  Top 0.254: U12.12 59.33,45.73 60.21,46.62 65.67,46.62 66.43,45.85 66.43,37.73 65.92,37.22 65.92,34.17 67.19,32.9 67.19,29.22 ICSP.4
N$1
  Bottom 0.254: T1.3 66.5,21.71 R4.1 R3.1
N$3  (via drill 0.33)
  Top 0.254: R6.1 23,47 v23,47.89 | R7.1 22.91,45.01 v22.74,44.84
  Top 0.406: C6.1 R6.1
  Bottom 0.254: v22.74,44.84 22.74,47.63 v23,47.89
N$4
  Top 0.406: R10.2 19.19,3.5 PWR.A
N$5  (via drill 0.33)
  Top 0.254: R8.1 21.93,38.49 v21.22,38.49 | C7.1 21.35,40.9 v21.47,40.77 22.1,40.77 R9.1
  Bottom 0.254: v21.22,38.49 21.47,38.74 v21.47,40.77
N$6
  Top 0.406: R12.2 22.07,3.08 LAN.A
N$8
  Top 0.254: R13.2 24.23,3.05
  Top 0.406: 24.23,3.05 WLAN.A
N$9
  Top 0.254: R14.2 26.52,3.13 SYS.A
N$11
  Bottom 0.305: U4.7 60.29,7.83 R5.1
N$12
  Bottom 0.305: U3.41 24.78,15.81 24.78,14.99 25.54,14.23 25.79,14.23 26.43,13.6 29.22,13.6 30.11,12.71 R23.1
N$16
  Bottom 0.305: U3.43 23.76,14.48 25.03,13.21 25.28,13.21 26.05,12.45 26.43,12.45 27.06,11.82 R21.2
N$19
  Bottom 0.305: C42.1 62.47,6.43 U4.8
N$22
  Bottom 0.254: R20.2 32.85,18.29 C36.1 34.48,18.35 37.98,21.85 43.29,21.85 U$14.5
N$23
  Bottom 0.305: U3.27 30.67,21.82 C20.1
N$24
  Bottom 0.305: U3.11 18.84,22.32 18.17,22.99 18.17,24.85 R27.2
N$25
  Bottom 0.305: U4.1 54.39,4.71 C43.1
N$26  (via drill 0.38)
  VCC 0.305: v56.14,5.47 56.14,7.12 54.24,9.02 v52.72,9.02
  Bottom 0.305: 55.3,4.71 C43.2 55.34,4.66 v56.14,5.47 | U4.3 52.77,8.97 v52.72,9.02
  pour Bottom (no thermals): 55.26,9.28 55.26,8.64 51.7,8.64 51.7,15.75 56.27,15.75 56.27,11.31 52.84,11.31 52.84,9.28
N$27
  Bottom 0.305: U4.6 62.76,8.97 C45.2 C44.2
N$28
  Bottom 0.305: C45.1 63.9,8.74 R28.2
N$29
  Bottom 0.305: U3.9 18.06,21.32 16.65,22.74 16.65,23.12 16.39,23.37 R32.2 C37.1
N$30
  Bottom 0.305: 15.96,21.47 R33.2 16.65,21.34 17.67,20.32 U3.7
N$31
  Bottom 0.305: R29.1 | R29.1 R30.2 62.33,11.14 61.48,10.29 60.21,10.29 U4.5
N$32
  Bottom 0.254: U10.1 59.07,23.88 C49.1
N$33  (via drill 0.33)
  Top 0.254: v59.07,20.33 57.29,22.1 v56.14,22.1
  Bottom 0.254: C49.2 59.07,21.31 v59.07,20.33 | v56.14,22.1 56.46,22.42 U10.3
  pour Bottom (no thermals): 49.67,25.79 54.24,25.79 54.24,22.49 56.14,22.49 56.14,24.64 56.78,24.64 56.78,21.6 49.67,21.6
N$34
  Bottom 0.305: U10.6 56.46,31.76 C51.2 C50.2
N$35
  Bottom 0.305: C51.1 57.03,34.39 R31.2
N$36
  Bottom 0.305: U10.5 55.01,29.9 R35.2 R34.1
N$37
  Bottom 0.305: U10.7 57.73,31.05 58.05,31.38 R36.1
N$38
  Bottom 0.305: C58.1 59.07,29.79 U10.8
N$101  (via drill 0.25, 0.33)
  VCC 0.305: v49.41,6.61 51.7,4.32 62.62,4.32 v65.42,7.12 | v58.05,34.04 58.05,20.71 v56.4,19.06
  Bottom 0.254: C57.1 55.27,20.47 55.38,20.58
  Bottom 0.305: C40.1 50.95,7.5 | v65.42,7.12 64.71,7.83 R5.2 | R36.2 v58.05,34.04 | v56.4,19.06 55.46,19.06 C55.1 | v49.41,6.61 49.41,7.13 49.79,7.51
  Bottom 0.61: C40.1 51.12,7.7 52.33,7.7 | 52.33,7.7 U4.2 | C41.1 52.33,6.9 52.33,7.7 | 57.67,22.36 57.73,22.42 U10.2
  Bottom 0.762: L3.2 48.8,17.02 55.38,17.02 55.38,18.94 | C55.1 55.38,18.94 | 55.38,18.94 55.38,20.58 55.38,20.83 57.67,20.83 57.67,22.36
  Bottom 1.016: L3.2 48.8,7.51 49.79,7.51 C40.1
P0_RX_N
  Top 0.254: 23,39.88 26.28,39.88 27.57,38.59 27.57,34.53 28.44,33.66 39.28,33.66 39.76,34.15 39.76,35.04 38.75,36.05 U1.8 | 23,39.88 18.83,39.88 16.27,37.32 16.27,35.54 15.65,34.93 12.94,34.93 12.33,35.54 12.33,36.07 12.82,36.56 X2.8 | R9.2 23,40.88 23,39.88
P0_RX_P
  Top 0.254: 23.12,39.38 26.07,39.38 27.06,38.38 27.06,34.32 28.23,33.15 39.49,33.15 40.27,33.94 40.27,35.03 41.29,36.05 U1.9 | 23.12,39.38 19.04,39.38 16.77,37.11 16.77,35.33 15.86,34.42 12.73,34.42 11.82,35.33 11.82,36.07 11.3,36.6 X2.7 | R8.2 23.12,38.77 23.12,39.38
P0_TX_N
  Top 0.254: 24.52,45.73 27.21,45.73 32.27,40.67 32.27,36.71 31.51,35.95 31.23,35.95 31.13,36.05 U1.5 | 24.52,45.73 13.35,45.73 12.58,44.96 12.58,44.08 12.84,43.82 13.48,43.82 X2.2 | R7.2 24.54,45.71 24.52,45.73
P0_TX_P  (1 unrouted)
  Top 0.254: 24.52,46.23 27.42,46.23 32.78,40.88 32.78,37.22 33.67,36.32 U1.6 | 24.52,46.23 13.09,46.23 12.33,45.47 11.32,45.47 X2.1 | R6.2 24.54,46.25 24.52,46.23 | 33.78,35.94 33.67,36.05 U1.6
P1_P2_PWR  (via drill 0.38, 0.61)
  Top 0.305: v9.03,22.99 9.03,23.37 8.77,23.63 | v10.81,14.87 10.37,14.87 J5.1 | v9.79,30.11 9.66,29.98 9.54,29.98 9.11,29.55 F1.1
  Top 1.27: F1.1 9.11,25.53 C39.2 C38.2 9.96,23.63 8.77,23.63 5.73,23.63 5.73,20.2 5.65,20.2 J5.5 J5.1
  Bottom 0.254: U9.4 13.96,13.9 13.94,13.89
  Bottom 0.305: v9.03,22.99 10.17,21.85 11.31,21.85 13.51,19.66 U8.4 | 13.94,13.89 13.22,14.61 11.06,14.61 v10.81,14.87 | R22.2 16.19,30.11 v9.79,30.11
RX
  Top 0.254: U11.1 47.78,45.75 50.68,48.65 58.56,48.65 59.45,49.54 59.45,51.7 60.21,52.46 64.15,52.46 J2.1
SCK
  Top 0.254: ICSP.3 64.65,29.22 64.65,44.46 63.51,45.6 60.84,45.6 60.33,45.08 U12.10
SD_CLK
  Bottom 0.254: U3.34 30.89,18.32 R20.1
SD_CMD
  Bottom 0.254: U3.36 36.76,17.32 38.62,19.18 41.67,19.18 42.17,19.69 43.33,19.69 U$14.3
SD_DAT0
  Bottom 0.254: U3.30 32.26,20.32 32.65,20.71 33.67,20.71 36.84,23.88 43.12,23.88 U$14.7
SD_DAT1
  Bottom 0.254: U3.29 32,20.82 32.4,21.22 33.28,21.22 37.28,25.21 U$14.8
SD_DAT2
  Bottom 0.254: U$14.1 38.47,17.51 35.19,14.23 26.55,14.23 25.79,14.99 25.79,15.79 U3.39
SD_DAT3
  Bottom 0.254: U3.38 26.26,16.61 26.55,16.9 27.32,16.9 27.44,16.77 36.97,16.77 38.8,18.61 U$14.2
SS
  Top 0.254: U12.13 58.83,44.44 TP1.P$1
TX
  Top 0.254: U11.8 49.01,45.7 51.32,48.01 60.46,48.01 J2.2
UART_RX  (via drill 0.9)
  Top 0.254: U1.33 41.29,11.94 42.81,13.47 43.7,13.47 47.64,17.41 47.64,33.03 48.78,34.17 49.41,34.17 50.05,34.8 v50.05,39.38 49.01,40.42 U11.5
UART_TX  (via drill 0.9)
  Top 0.254: U1.34 38.75,10.95 | 38.77,10.95 38.75,10.95 | 38.75,10.95 38.75,12.07 40.65,13.98 43.44,13.98 47.13,17.66 47.13,33.41 47.64,33.92 47.64,39.25 v47.51,39.38 47.51,41.66 U11.4
  Top 0.406: 38.75,10.67 U1.34
USB3_D_N
  Bottom 0.191: U3.2 18.32,17.82 18.3,17.84 17.87,17.84 16.84,16.82 16.84,14.78 13.48,11.42 | 13.48,11.42 13.05,10.99 5.03,10.99 4.2,11.82 4.2,13.72 4.84,14.36 5.53,14.36 J5.6 | U9.2 13.98,10.93 13.48,11.42
USB3_D_P
  Bottom 0.191: U3.3 18.38,18.32 18.3,18.24 17.71,18.24 16.45,16.98 16.45,14.95 13.59,12.08 | 13.59,12.08 12.88,11.38 6.73,11.38 J5.7 | U9.3 13.18,12.49 13.59,12.08
USB4_D_N
  Bottom 0.191: U3.4 19.1,18.82 19.06,18.86 16.35,18.86 15.08,17.59 11.57,17.59 | 11.57,17.59 10.51,17.59 10.11,17.2 10.11,16.31 9.24,15.43 8.9,15.43 8.27,14.8 J5.2 | U8.2 11.58,17.58 11.57,17.59
USB4_D_P
  Bottom 0.191: U3.5 19.13,19.32 19.06,19.25 16.18,19.25 14.91,17.98 11.57,17.98 | 11.57,17.98 10.34,17.98 9.72,17.36 9.72,16.47 9.07,15.82 7.45,15.82 6.87,15.25 6.87,13.87 J5.3 | U8.3 11.58,17.99 11.57,17.98
USB_N  (via drill 0.33)
  Top 0.191: 18.57,33.55 19.21,33.55 20.08,32.69 21.29,32.69 23.17,30.81 23.17,26.93 v23.63,26.93
  Top 0.254: U1.50 18.57,33.66 18.57,33.55
  Bottom 0.191: v23.63,26.93 23.25,26.93 23.26,26.92 U3.17
USB_P  (via drill 0.33)
  Top 0.191: 18.57,31.01 18.74,31.01 20.08,32.35 21.15,32.35 22.83,30.67 22.83,26.93 v22.36,26.93
  Top 0.254: 18.57,31.01 18.44,31.01 U1.49
  Bottom 0.191: v22.36,26.93 22.74,26.93 22.76,26.91 U3.16
VCC1.8  (via drill 0.33, 0.38, 0.41)
  Top 0.254: v25.79,27.06 27.32,25.53 v27.44,25.53
  VCC 0.406: v13.98,21.34 15.5,22.87 v21.22,22.87
  Bottom 0.254: U3.19 24.26,25.15 25.79,26.68 v25.79,27.06 | U3.23 26.26,25.37 26.93,26.04 C31.1 27.62,25.71 v27.44,25.53
  Bottom 0.305: U3.12 19.76,23.37 19.76,24.83 18.17,26.42 C33.1 | C32.1 27.32,28.2 26.81,27.69 26.43,27.69 v25.79,27.06
  Bottom 0.406: R33.1 v13.98,21.34 | v21.22,22.87 20.27,22.87 19.76,23.37
  pour GND: 20.71,24.52 25.03,24.52 25.03,27.57 26.68,27.57 26.68,26.42 27.95,26.42 27.95,24.52 27.44,24.52 27.44,23.37 21.98,23.37 21.98,22.36 20.71,22.36
VCC3.3
  Bottom 0.254: C27.1 26.93,27.06 25.79,25.91 25.79,24.35 U3.22 | U3.1 19.76,16 C30.1
  Bottom 0.305: C26.1 26.05,11.56 24.9,12.71 24.78,12.71 23.26,14.22 U3.44 23.26,17.39 23.25,17.41 | C25.1 C24.1 28.08,11.94 26.93,13.09 26.17,13.09 25.54,13.72 25.28,13.72 24.27,14.74 U3.42 24.26,17.4 24.27,17.41 | C28.1 20.97,26.68 22.26,25.38 U3.15 22.26,23.35 22.49,23.12 22.49,22.36 21.98,21.85 21.47,21.85 | C29.1 16.77,20.33 17.28,19.82 U3.6 21.34,19.82 | C23.1 17.28,23.58 17.28,22.99 18.45,21.82 U3.10 20.94,21.82 20.97,21.85 | 25.79,21.34 25.76,21.37 U3.22 | U3.1 21.01,17.32 21.09,17.41
  Bottom 0.406: C23.1 16.7,24.62 R27.1 | 22.74,21.34 22.74,21.85 21.47,21.85 20.97,21.85 | 21.34,19.82 22.49,19.82 22.74,20.07
  Bottom 0.813: 25.79,21.34 25.79,18.55 24.65,17.41 24.27,17.41 23.25,17.41 22.74,17.41 | 22.74,17.41 22.74,20.07 22.74,21.34 22.74,21.72 | 21.09,17.41 22.74,17.41
VDC  (via drill 0.33)
  Top 0.254: U11.7 49.85,42.93 C2.2
  Top 0.305: C2.2 50.48,43.57 51.32,43.57 51.57,43.82 v51.57,44.58 55.51,44.58 55.89,44.2 56.78,44.2 57.03,43.95 57.03,43.2 C4.2 57.45,42.67 U12.14
  Bottom 0.406: SV1.2 36.46,45.22 40.4,45.22 40.4,44.58 v51.57,44.58
VIN
  Bottom 1.27: 45.48,9.03 L3.1 44.9,6.17 45.22,5.85 47,5.85 48.02,4.83 J3.8
XSCI
  Bottom 0.254: X1.1 21.68,10.92 C18.1 21.6,12.02 21.6,12.71 22.26,13.37 U3.46
XSCO
  Bottom 0.254: X1.3 23.16,8.61 22.36,9.4 22.36,11.39 C21.1 22.76,12.1 U3.45

## Text on the board
tPlace: 13 | 12 | 11 | 10 | 9 | 8 | 7 | 6 | 5 | 4 | 3 | 2 | 1 | 0 | SS
tNames: DIGITAL | GND | AREF | RX | TX | 5V | 3.3V | [Arduino IO voltage] | YUN SHIELD V2.3 | 1 | A3 | A4 | A5 | IOREF | RST | 3V3 | 5V | GND | GND | VIN | A0 | A1 | A2
214bmp: D:/SmartProjects/Snc/a4_bn_logo2.bmp